# Altium PCB BL652 Solder PAD.PcbDoc
Units mil, origin at the board's own origin, x right, y up, seen from the top; angles counter-clockwise.
Board outline 6000 x 4000 mil, 2 copper layers (Top, Bottom), stack 12.7 mil thick; 1 components, 0 nets, 39 pads, 0 vias.
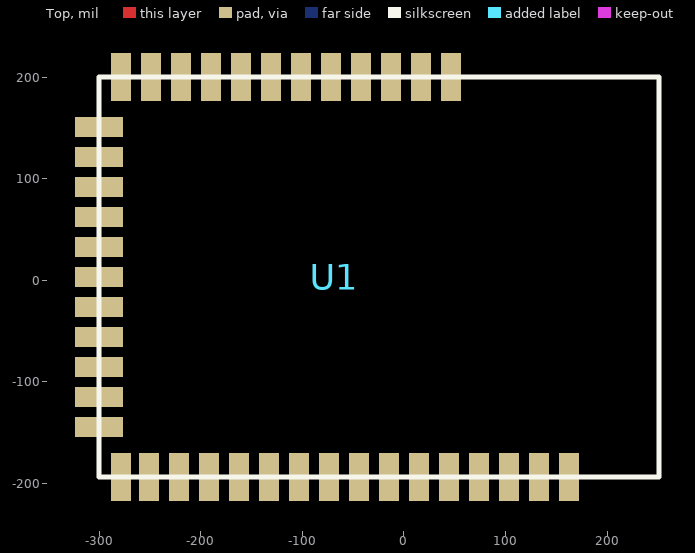
[diagram p0: Top view]
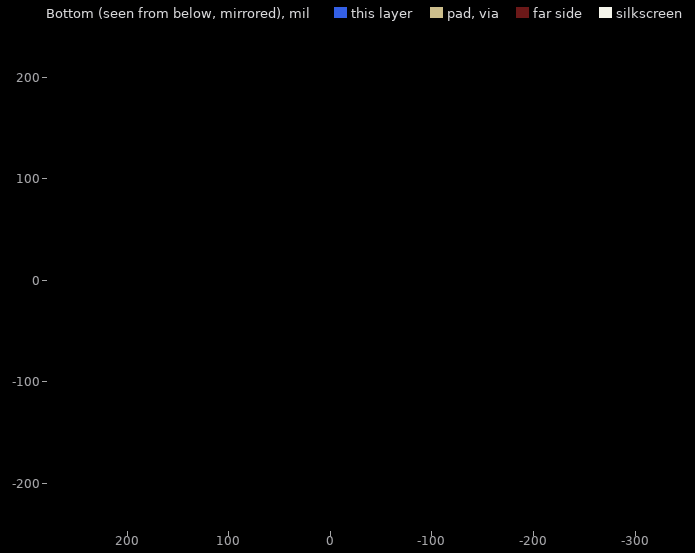
[diagram p1: Bottom view, seen from below]

## Layer stack, top to bottom
Solder Mask Top: solder mask 0.4, Solder Resist, Dk 3.5
Top: signal copper 1.35
Dielectric 1: dielectric 10, FR-4, Dk 4.3
Bottom: signal copper 1.35
Solder Mask Bottom: solder mask 0.4, Solder Resist, Dk 3.5

## Board outline
-9000,-9000 -3000,-9000 -3000,-5000 -9000,-5000

## Design rules (kind name [scope] priority, off if disabled: settings)
Clearance "Clearance - Default - DEFAULT- SMD" [IsVia vs IsSMTPin] p1: gap=6 ignorepadtopadclearanceinfootprint=FALSE
Clearance "Clearance - Default - DEFAULT - Via" [IsVia vs IsVia] p2: gap=6 ignorepadtopadclearanceinfootprint=FALSE
Clearance "Clearance - Default - DEFAULT - Net" [All] p3: gap=6 ignorepadtopadclearanceinfootprint=FALSE except(0: Arc-Hole Track-Hole SMDPad-Hole THPad-Hole Via-Hole Fill-Hole Poly-Hole Region-Hole Text-Hole; 10: Fill-Fill Fill-Poly Fill-Region Poly-Poly Poly-Region Region-Region Text-Text)
ComponentClearance "ComponentClearance - Default - DEFAULT" [All] p1: gap=6 collisioncheckmode=3 verticalgap=10 showdistances=FALSE
FanoutControl Fanout_Small [(CompPinCount < 5)] p3: bgadir=Out bgaviamode=Centered fanoutstyle=Auto fanoutdirection=OutThenIn viagrid=1 // Fanout_Small (Default Rule)
FanoutControl Fanout_SOIC [IsSOIC] p4: bgadir=Out bgaviamode=Centered fanoutstyle=Auto fanoutdirection=Alternating viagrid=1 // Fanout_SOIC (Default Rule)
HoleToHoleClearance "HoleToHoleClearance - Default - DEFAULT" [All] p1: gap=6 allowstackedmicrovias=TRUE
Length "Default Length" [All] p1: maxlimit=50000 minlimit=0
MaxMinImpedance "Default Impedance" [All] p1: minimum=50,00 maximum=150,0
ParallelSegment "Default Parallel Segment Adjasent" [All] p1: limit=1000 gap=200
ParallelSegment "Default Parallel Segment Same Layer" [All] p2: limit=1000 gap=200
PlaneConnect "Default PlaneConnect" [All] p1: planeconnectstyle=Relief reliefexpansion=20 reliefentries=4 reliefconductorwidth=15 reliefairgap=10
PolygonConnect "PolygonConnect - Default SMT" [IsSMTPin] p1: connectstyle=Relief reliefconductorwidth=10 reliefentries=4 polygonreliefangle="45 Angle" airgapwidth=10
PolygonConnect "PolygonConnect - Default Pad" [All] p2: connectstyle=Relief reliefconductorwidth=15 reliefentries=4 polygonreliefangle="45 Angle" airgapwidth=10
RoutingLayers "RoutingLayers - Default - DEFAULT" [All] p1: top layer_v5=TRUE bottom layer_v5=TRUE
RoutingPriority "RoutingPriority - Default - DEFAULT" [All] p1: routingpriority=3
RoutingTopology "Default Routing Topology" [All] p1: topology=Shortest
RoutingVias "RoutingVias - Default - DEFAULT" [All] p1: holewidth=37 width=55 viastyle="Through Hole" minholewidth=37 minwidth=55 maxholewidth=37 maxwidth=55
SMDToCorner "SMDToCorner - Default - DEFAULT" [All] p1: distance=60000
SolderMaskExpansion [All] p1: expansion=4
Width "Default Width" [All] p1: maxlimit=12 minlimit=12 preferedwidth=12
20 further rules are at their usual default settings.

## Components (designator, comment, footprint, x,y, rotation, side; value= is the part's Value field where it differs from the comment)
U1 "BL652_SOLDER_PAD_P39" BL652_SOLDER_PAD_P39 -300,200 r0 top

## Footprints (in the part's own frame and the unit in brackets; to place one, negate y for a bottom-side part, rotate by r counter-clockwise, add the part's x,y. Pads: shape width x height; smd on the part's side, far side on the other; paste and mask are expansions set on the pad)
BL652_SOLDER_PAD_P39 [mm]
  rect 0.5x1.2 smd: 1(11.75,-10) 2(11,-10) 3(10.25,-10) 4(9.5,-10) 5(8.75,-10) 6(8,-10) 7(7.25,-10) 8(6.5,-10) 9(5.75,-10) 10(5,-10) 11(4.25,-10) 12(3.5,-10) 13(2.75,-10) 14(2,-10) 15(1.25,-10) 16(0.55,-10) 28(0.55,0) 29(1.3,0) 30(2.05,0) 31(2.8,0) 32(3.55,0) 33(4.3,0) 34(5.05,0) 35(5.8,0) 36(6.55,0) 37(7.3,0) 38(8.05,0) 39(8.8,0)
  rect 1.2x0.5 smd: 17(0,-8.75) 18(0,-8) 19(0,-7.25) 20(0,-6.5) 21(0,-5.75) 22(0,-5) 23(0,-4.25) 24(0,-3.5) 25(0,-2.75) 26(0,-2) 27(0,-1.25)
  silkscreen extent 0,-10 14,0

## Nets (pads, with @x,y where several pads share a name; then routed paths per layer and width w, separated by ;. In a path a pad name is that pad's centre, name@x,y a point inside that pad or via, vN(x,y) a via of type N, cw(c..) or ccw(c..) an arc to the next point about the centre after c; other vN are vias at no path point)
pads on no net: U1.1 U1.2 U1.3 U1.4 U1.5 U1.6 U1.7 U1.8 U1.9 U1.10 U1.11 U1.12 U1.13 U1.14 U1.15 U1.16 U1.17 U1.18 U1.19 U1.20 U1.21 U1.22 U1.23 U1.24 U1.25 U1.26 U1.27 U1.28 U1.29 U1.30 U1.31 U1.32 U1.33 U1.34 U1.35 U1.36 U1.37 U1.38 U1.39